# EAGLE board untitled (EAGLE 9.6.2)
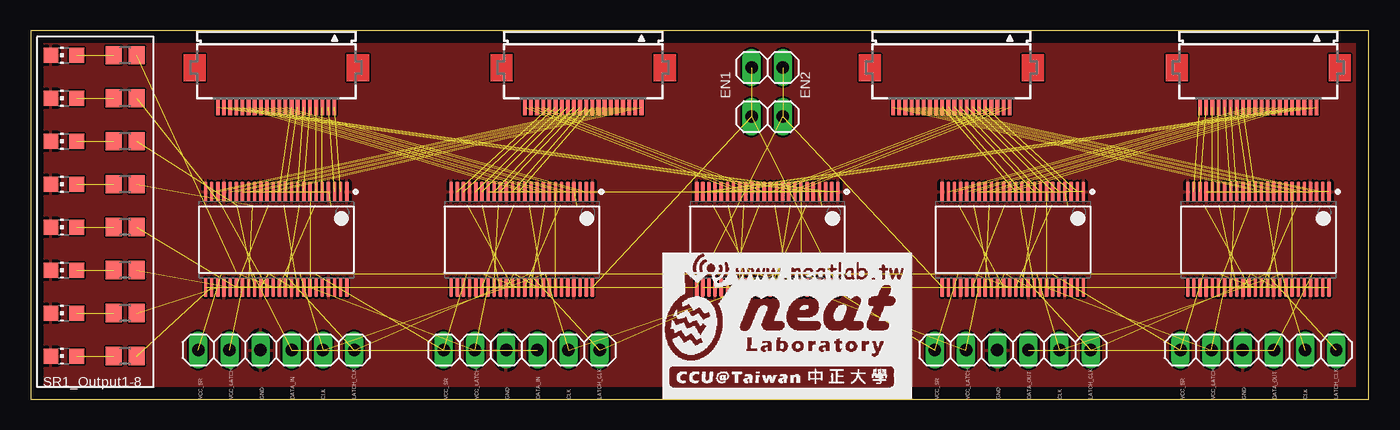
[diagram p0: board, top side]
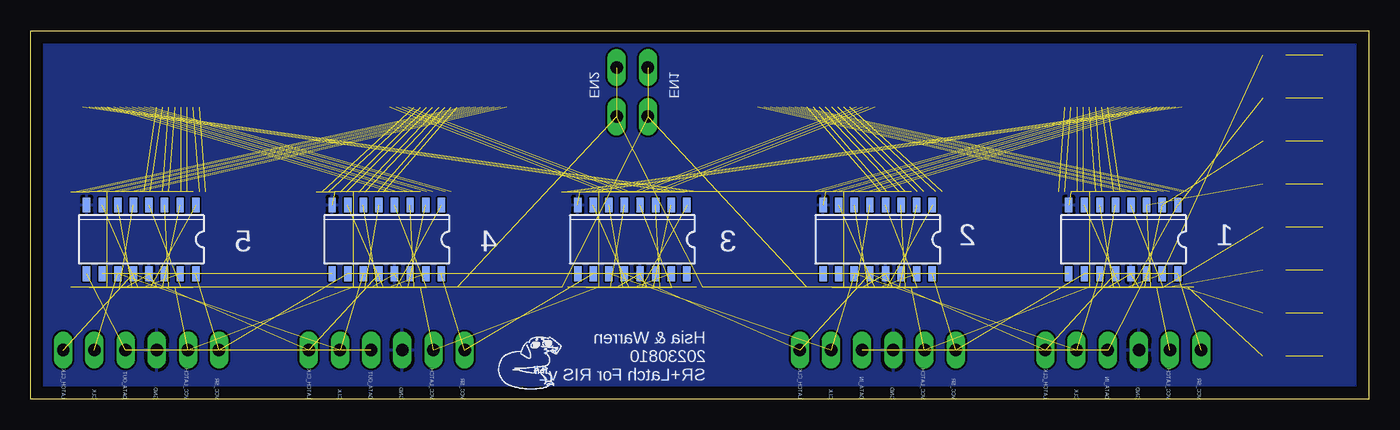
[diagram p1: board, bottom side, seen from below]

Size 109 x 30 mm. Coordinates in mm from the lower left corner, seen from the top.
Outline: 0,0 109,0 109,30 0,30 0,0
Copper layers (1+2*15+16): Top 0.035mm / dielectric 1.5mm / Route2 0.035mm / dielectric 0.15mm / Route15 0.035mm / dielectric 0.2mm / Bottom 0.035mm
Design rules "default *": minimum track width 6mil, minimum drill 0.35mm, track to track 6mil, track to pad 6mil, pad to pad 6mil, via to via 6mil, smd to smd 6mil, copper to edge 40mil, drill to drill 6mil, minimum pad ring 10mil, minimum via ring 8mil, stop-mask expansion 4mil, vias tented up to drill 0mil, thermal gap 10mil

## Footprints (pad centres in the part's own frame; a part is rotated, then mirrored left to right if it is on the bottom)
1X02 = drill 1.016 long: 1 -1.27,0; 2 1.27,0
1X06 = drill 1.016 long: 1 -6.35,0; 2 -3.81,0; 3 -1.27,0; 4 1.27,0; 5 3.81,0; 6 6.35,0
CHIP-LED0805 = smd 1.2 x 1.2: A 0,-1.05; C 0,1.05
R0805 = smd 1.3 x 1.5: 1 -0.95,0; 2 0.95,0
SO16 = smd 0.6 x 1.2: 1 -4.445,-2.8; 2 -3.175,-2.8; 3 -1.905,-2.8; 4 -0.635,-2.8; 5 0.635,-2.8; 6 1.905,-2.8; 7 3.175,-2.8; 8 4.445,-2.8; 9 4.445,2.8; 10 3.175,2.8; 11 1.905,2.8; 12 0.635,2.8; 13 -0.635,2.8; 14 -1.905,2.8; 15 -3.175,2.8; 16 -4.445,2.8
TEXAS_INSTRUMENTS_SN74LVC16373A_2 = smd 1.6 x 0.3: 1 -3.9,5.75; 2 -3.9,5.25; 3 -3.9,4.75; 4 -3.9,4.25; 5 -3.9,3.75; 6 -3.9,3.25; 7 -3.9,2.75; 8 -3.9,2.25; 9 -3.9,1.75; 10 -3.9,1.25; 11 -3.9,0.75; 12 -3.9,0.25; 13 -3.9,-0.25; 14 -3.9,-0.75; 15 -3.9,-1.25; 16 -3.9,-1.75; 17 -3.9,-2.25; 18 -3.9,-2.75; 19 -3.9,-3.25; 20 -3.9,-3.75; 21 -3.9,-4.25; 22 -3.9,-4.75; 23 -3.9,-5.25; 24 -3.9,-5.75; 25 3.9,-5.75; 26 3.9,-5.25; 27 3.9,-4.75; 28 3.9,-4.25; 29 3.9,-3.75; 30 3.9,-3.25; 31 3.9,-2.75; 32 3.9,-2.25; 33 3.9,-1.75; 34 3.9,-1.25; 35 3.9,-0.75; 36 3.9,-0.25; 37 3.9,0.25; 38 3.9,0.75; 39 3.9,1.25; 40 3.9,1.75; 41 3.9,2.25; 42 3.9,2.75; 43 3.9,3.25; 44 3.9,3.75; 45 3.9,4.25; 46 3.9,4.75; 47 3.9,5.25; 48 3.9,5.75
FH12-20S-0.5SH = smd 0.3 x 1.3: 1 -4.75,3.25; 2 -4.25,3.25; 3 -3.75,3.25; 4 -3.25,3.25; 5 -2.75,3.25; 6 -2.25,3.25; 7 -1.75,3.25; 8 -1.25,3.25; 9 -0.75,3.25; 10 -0.25,3.25; 11 0.25,3.25; 12 0.75,3.25; 13 1.25,3.25; 14 1.75,3.25; 15 2.25,3.25; 16 2.75,3.25; 17 3.25,3.25; 18 3.75,3.25; 19 4.25,3.25; 20 4.75,3.25

## Placement (x,y rotation side)
JP5  [1X02]  60,23 0 top
JP6  [1X02]  60,27 0 top
JP7  [1X06]  40,4 0 top
JP8  [1X06]  20,4 0 top
JP9  [1X06]  80,4 0 top
JP10  [1X06]  100,4 0 top
LED1  [CHIP-LED0805]  2.7,28 90 top
LED2  [CHIP-LED0805]  2.7,24.5 90 top
LED3  [CHIP-LED0805]  2.7,21 90 top
LED4  [CHIP-LED0805]  2.7,17.5 90 top
LED5  [CHIP-LED0805]  2.7,14 90 top
LED6  [CHIP-LED0805]  2.7,10.5 90 top
LED7  [CHIP-LED0805]  2.7,7 90 top
LED8  [CHIP-LED0805]  2.7,3.5 90 top
R1  [R0805]  7.7,28 180 top
R2  [R0805]  7.7,24.5 180 top
R3  [R0805]  7.7,21 180 top
R4  [R0805]  7.7,17.5 180 top
R5  [R0805]  7.7,14 180 top
R6  [R0805]  7.7,10.5 180 top
R7  [R0805]  7.7,7 180 top
R8  [R0805]  7.7,3.5 180 top
SR1  74HC595  [SO16]  20,13 180 bottom
SR2  74HC595  [SO16]  40,13 180 bottom
SR3  74HC595  [SO16]  60,13 180 bottom
SR4  74HC595  [SO16]  80,13 180 bottom
SR5  74HC595  [SO16]  100,13 180 bottom
U1  TEXAS_INSTRUMENTS_SN74LVC16373ATEXAS_INSTRUMENTS_SN74LVC16373A_0_2  [TEXAS_INSTRUMENTS_SN74LVC16373A_2]  20,13 270 top
U2  TEXAS_INSTRUMENTS_SN74LVC16373ATEXAS_INSTRUMENTS_SN74LVC16373A_0_2  [TEXAS_INSTRUMENTS_SN74LVC16373A_2]  40,13 270 top
U3  TEXAS_INSTRUMENTS_SN74LVC16373ATEXAS_INSTRUMENTS_SN74LVC16373A_0_2  [TEXAS_INSTRUMENTS_SN74LVC16373A_2]  60,13 270 top
U4  TEXAS_INSTRUMENTS_SN74LVC16373ATEXAS_INSTRUMENTS_SN74LVC16373A_0_2  [TEXAS_INSTRUMENTS_SN74LVC16373A_2]  80,13 270 top
U5  TEXAS_INSTRUMENTS_SN74LVC16373ATEXAS_INSTRUMENTS_SN74LVC16373A_0_2  [TEXAS_INSTRUMENTS_SN74LVC16373A_2]  100,13 270 top
U$1  [LOGO_SCALE_2.0]  51.5,0 0 top
X1  FH12-20S-0.5SH  [FH12-20S-0.5SH]  20,27 180 top
X2  FH12-20S-0.5SH  [FH12-20S-0.5SH]  75,27 180 top
X3  FH12-20S-0.5SH  [FH12-20S-0.5SH]  45,27 180 top
X4  FH12-20S-0.5SH  [FH12-20S-0.5SH]  100,27 180 top

## Library data of the parts
JP5-JP10 = pinhead
LED1-LED8 = led
R1-R8 = rcl; SPICEPREFIX: R
SR1-SR5 = 74HC595; AVAILABILITY: In Stock; DESCRIPTION: Shift Register Single 8-Bit Serial to Serial/Parallel 16-Pin SSOP T/R; MF: Nexperia; MP: 74HC595; PACKAGE: None; PRICE: None
U1-U5 = SN74LVC16373A(NEW_16BIT_LATCH); 3_STATE_OUTPUT: Yes; BITS: 16; CIIVA_IDS: 19307467; CODE__JEDEC: MO-153; DATASHEET_VERSION: SCAS755B; FOOTPRINT_VARIANT_NAME_0: Level C; FOOTPRINT_VARIANT_NAME_1: Level B; FOOTPRINT_VARIANT_NAME_2: Level A; F__NOM_VOLTAGEMAXMHZ: 100; ICC__NOM_VOLTAGEMAXMA: 0.02; IMPORTED: yes; IMPORTED_FROM: vault; IMPORT_TS: 1521844253; INPUT_TYPE: CMOS,TTL; LOGIC: true; MF: Texas Instruments; MPN: SN74LVC16373A; OPERATING_TEMPERATURE_RANGEC: -40 to 125,-40 to 85; OUTPUT_DRIVE_IOLIOHMAXMA: 24/-24; OUTPUT_LOGIC: Non-inverted; OUTPUT_TYPE: CMOS; PACKAGE: DGG0048A; PREFIX: U; RATING: Catalog; RELEASE_DATE: 1459328133; SCHMITT_TRIGGER: No; STATIC_CURRENT: 0.02; TECHNOLOGY_FAMILY: LVC; TPD__NOM_VOLTAGEMAXNS: 6.4,4.2,4.9; VAULT_GUID: 00FB3570-8383-4C82-A038-A58A20934C8C; VAULT_REVISION: B0EE8CD6-9ACA-4FFF-ACFC-C0240CF4C59E; VCC_MAX_V: 3.6; VCC_MIN_V: 1.65; VOLTAGE_NOM_V: 1.8,2.5,2.7,3.3
U$1 = all_in_one
X1-X4 = con-hirose; MPN: FH12-20S-0.5SH(55); OC_FARNELL: 1324549; OC_NEWARK: 34M6166

## Nets
CLK: JP7.5 JP8.5 JP9.5 JP10.5 SR1.11 SR2.11 SR3.11 SR4.11 SR5.11
DATA_IN: JP7.4 JP8.4 SR1.14
DATA_OUT: JP9.4 JP10.4 SR5.9
EN1: JP5.1 JP6.1 U1.48 U2.48 U3.48 U4.48 U5.48
EN2: JP5.2 JP6.2 U1.25 U2.25 U3.25 U4.25 U5.25
GND: JP7.3 JP8.3 JP9.3 JP10.3 LED1.C LED2.C LED3.C LED4.C LED5.C LED6.C LED7.C LED8.C SR1.8 SR1.13 SR2.8 SR2.13 SR3.8 SR3.13 SR4.8 SR4.13 SR5.8 SR5.13 U1.1 U1.4 U1.10 U1.15 U1.21 U1.24 U1.28 U1.34 U1.39 U1.45 U2.1 U2.4 U2.10 U2.15 U2.21 U2.24 U2.28 U2.34 U2.39 U2.45 U3.1 U3.4 U3.10 U3.15 U3.21 U3.24 U3.28 U3.34 U3.39 U3.45 U4.1 U4.4 U4.10 U4.15 U4.21 U4.24 U4.28 U4.34 U4.39 U4.45 U5.1 U5.4 U5.10 U5.15 U5.21 U5.24 U5.28 U5.34 U5.39 U5.45
LATCH_CLK: JP7.6 JP8.6 JP9.6 JP10.6 SR1.12 SR2.12 SR3.12 SR4.12 SR5.12
LED1_1: U1.2 X1.1
LED1_2: U1.3 X1.2
LED1_3: U1.5 X1.3
LED1_4: U1.6 X1.4
LED1_5: U1.8 X1.5
LED1_6: U1.9 X1.6
LED1_7: U1.11 X1.7
LED1_8: U1.12 X1.8
LED1_9: U2.2 X1.9
LED1_10: U2.3 X1.10
LED1_11: U2.5 X1.11
LED1_12: U2.6 X1.12
LED1_13: U2.8 X1.13
LED1_14: U2.9 X1.14
LED1_15: U2.11 X1.15
LED1_16: U2.12 X1.16
LED1_17: U3.2 X1.17
LED1_18: U3.3 X1.18
LED1_19: U3.5 X1.19
LED1_20: U3.6 X1.20
LED1_21: U3.8 X2.1
LED1_22: U3.9 X2.2
LED1_23: U3.11 X2.3
LED1_24: U3.12 X2.4
LED1_25: U4.2 X2.5
LED1_26: U4.3 X2.6
LED1_27: U4.5 X2.7
LED1_28: U4.6 X2.8
LED1_29: U4.8 X2.9
LED1_30: U4.9 X2.10
LED1_31: U4.11 X2.11
LED1_32: U4.12 X2.12
LED1_33: U5.2 X2.13
LED1_34: U5.3 X2.14
LED1_35: U5.5 X2.15
LED1_36: U5.6 X2.16
LED1_37: U5.8 X2.17
LED1_38: U5.9 X2.18
LED1_39: U5.11 X2.19
LED1_40: U5.12 X2.20
LED2_1: U1.13 X3.1
LED2_2: U1.14 X3.2
LED2_3: U1.16 X3.3
LED2_4: U1.17 X3.4
LED2_5: U1.19 X3.5
LED2_6: U1.20 X3.6
LED2_7: U1.22 X3.7
LED2_8: U1.23 X3.8
LED2_9: U2.13 X3.9
LED2_10: U2.14 X3.10
LED2_11: U2.16 X3.11
LED2_12: U2.17 X3.12
LED2_13: U2.19 X3.13
LED2_14: U2.20 X3.14
LED2_15: U2.22 X3.15
LED2_16: U2.23 X3.16
LED2_17: U3.13 X3.17
LED2_18: U3.14 X3.18
LED2_19: U3.16 X3.19
LED2_20: U3.17 X3.20
LED2_21: U3.19 X4.1
LED2_22: U3.20 X4.2
LED2_23: U3.22 X4.3
LED2_24: U3.23 X4.4
LED2_25: U4.13 X4.5
LED2_26: U4.14 X4.6
LED2_27: U4.16 X4.7
LED2_28: U4.17 X4.8
LED2_29: U4.19 X4.9
LED2_30: U4.20 X4.10
LED2_31: U4.22 X4.11
LED2_32: U4.23 X4.12
LED2_33: U5.13 X4.13
LED2_34: U5.14 X4.14
LED2_35: U5.16 X4.15
LED2_36: U5.17 X4.16
LED2_37: U5.19 X4.17
LED2_38: U5.20 X4.18
LED2_39: U5.22 X4.19
LED2_40: U5.23 X4.20
N$1: SR1.9 SR2.14
N$2: SR4.9 SR5.14
N$3: LED1.A R1.2
N$4: LED2.A R2.2
N$5: LED3.A R3.2
N$6: LED4.A R4.2
N$7: LED5.A R5.2
N$8: SR2.9 SR3.14
N$9: LED6.A R6.2
N$10: LED7.A R7.2
N$11: LED8.A R8.2
N$15: SR3.9 SR4.14
SR_OUT1_1: R1.1 SR1.15 U1.36 U1.47
SR_OUT1_2: R2.1 SR1.1 U1.35 U1.46
SR_OUT1_3: R3.1 SR1.2 U1.33 U1.44
SR_OUT1_4: R4.1 SR1.3 U1.32 U1.43
SR_OUT1_5: R5.1 SR1.4 U1.30 U1.41
SR_OUT1_6: R6.1 SR1.5 U1.29 U1.40
SR_OUT1_7: R7.1 SR1.6 U1.27 U1.38
SR_OUT1_8: R8.1 SR1.7 U1.26 U1.37
SR_OUT2_1: SR2.15 U2.36 U2.47
SR_OUT2_2: SR2.1 U2.35 U2.46
SR_OUT2_3: SR2.2 U2.33 U2.44
SR_OUT2_4: SR2.3 U2.32 U2.43
SR_OUT2_5: SR2.4 U2.30 U2.41
SR_OUT2_6: SR2.5 U2.29 U2.40
SR_OUT2_7: SR2.6 U2.27 U2.38
SR_OUT2_8: SR2.7 U2.26 U2.37
SR_OUT3_1: SR3.15 U3.36 U3.47
SR_OUT3_2: SR3.1 U3.35 U3.46
SR_OUT3_3: SR3.2 U3.33 U3.44
SR_OUT3_4: SR3.3 U3.32 U3.43
SR_OUT3_5: SR3.4 U3.30 U3.41
SR_OUT3_6: SR3.5 U3.29 U3.40
SR_OUT3_7: SR3.6 U3.27 U3.38
SR_OUT3_8: SR3.7 U3.26 U3.37
SR_OUT4_1: SR4.15 U4.36 U4.47
SR_OUT4_2: SR4.1 U4.35 U4.46
SR_OUT4_3: SR4.2 U4.33 U4.44
SR_OUT4_4: SR4.3 U4.32 U4.43
SR_OUT4_5: SR4.4 U4.30 U4.41
SR_OUT4_6: SR4.5 U4.29 U4.40
SR_OUT4_7: SR4.6 U4.27 U4.38
SR_OUT4_8: SR4.7 U4.26 U4.37
SR_OUT5_1: SR5.15 U5.36 U5.47
SR_OUT5_2: SR5.1 U5.35 U5.46
SR_OUT5_3: SR5.2 U5.33 U5.44
SR_OUT5_4: SR5.3 U5.32 U5.43
SR_OUT5_5: SR5.4 U5.30 U5.41
SR_OUT5_6: SR5.5 U5.29 U5.40
SR_OUT5_7: SR5.6 U5.27 U5.38
SR_OUT5_8: SR5.7 U5.26 U5.37
VCC_LATCH: JP7.2 JP8.2 JP9.2 JP10.2 U1.7 U1.18 U1.31 U1.42 U2.7 U2.18 U2.31 U2.42 U3.7 U3.18 U3.31 U3.42 U4.7 U4.18 U4.31 U4.42 U5.7 U5.18 U5.31 U5.42
VCC_SR: JP7.1 JP8.1 JP9.1 JP10.1 SR1.10 SR1.16 SR2.10 SR2.16 SR3.10 SR3.16 SR4.10 SR4.16 SR5.10 SR5.16

## Tracks (layer width: path | path; a pad name or v marks a point on that pad's centre or on a via)
CLK  (8 unrouted)
DATA_IN  (2 unrouted)
DATA_OUT  (2 unrouted)
EN1  (6 unrouted)
EN2  (6 unrouted)
GND  (39 unrouted)
  pour Top: -1,31 -1,-1 110,-1 110,31 109,32 1,32 0,31
  pour Bottom: -1,35 -1,-3 112,-3 112,32 110,34 109,35
LATCH_CLK  (8 unrouted)
LED1_1  (1 unrouted)
LED1_2  (1 unrouted)
LED1_3  (1 unrouted)
LED1_4  (1 unrouted)
LED1_5  (1 unrouted)
LED1_6  (1 unrouted)
LED1_7  (1 unrouted)
LED1_8  (1 unrouted)
LED1_9  (1 unrouted)
LED1_10  (1 unrouted)
LED1_11  (1 unrouted)
LED1_12  (1 unrouted)
LED1_13  (1 unrouted)
LED1_14  (1 unrouted)
LED1_15  (1 unrouted)
LED1_16  (1 unrouted)
LED1_17  (1 unrouted)
LED1_18  (1 unrouted)
LED1_19  (1 unrouted)
LED1_20  (1 unrouted)
LED1_21  (1 unrouted)
LED1_22  (1 unrouted)
LED1_23  (1 unrouted)
LED1_24  (1 unrouted)
LED1_25  (1 unrouted)
LED1_26  (1 unrouted)
LED1_27  (1 unrouted)
LED1_28  (1 unrouted)
LED1_29  (1 unrouted)
LED1_30  (1 unrouted)
LED1_31  (1 unrouted)
LED1_32  (1 unrouted)
LED1_33  (1 unrouted)
LED1_34  (1 unrouted)
LED1_35  (1 unrouted)
LED1_36  (1 unrouted)
LED1_37  (1 unrouted)
LED1_38  (1 unrouted)
LED1_39  (1 unrouted)
LED1_40  (1 unrouted)
LED2_1  (1 unrouted)
LED2_2  (1 unrouted)
LED2_3  (1 unrouted)
LED2_4  (1 unrouted)
LED2_5  (1 unrouted)
LED2_6  (1 unrouted)
LED2_7  (1 unrouted)
LED2_8  (1 unrouted)
LED2_9  (1 unrouted)
LED2_10  (1 unrouted)
LED2_11  (1 unrouted)
LED2_12  (1 unrouted)
LED2_13  (1 unrouted)
LED2_14  (1 unrouted)
LED2_15  (1 unrouted)
LED2_16  (1 unrouted)
LED2_17  (1 unrouted)
LED2_18  (1 unrouted)
LED2_19  (1 unrouted)
LED2_20  (1 unrouted)
LED2_21  (1 unrouted)
LED2_22  (1 unrouted)
LED2_23  (1 unrouted)
LED2_24  (1 unrouted)
LED2_25  (1 unrouted)
LED2_26  (1 unrouted)
LED2_27  (1 unrouted)
LED2_28  (1 unrouted)
LED2_29  (1 unrouted)
LED2_30  (1 unrouted)
LED2_31  (1 unrouted)
LED2_32  (1 unrouted)
LED2_33  (1 unrouted)
LED2_34  (1 unrouted)
LED2_35  (1 unrouted)
LED2_36  (1 unrouted)
LED2_37  (1 unrouted)
LED2_38  (1 unrouted)
LED2_39  (1 unrouted)
LED2_40  (1 unrouted)
N$1  (1 unrouted)
N$2  (1 unrouted)
N$3  (1 unrouted)
N$4  (1 unrouted)
N$5  (1 unrouted)
N$6  (1 unrouted)
N$7  (1 unrouted)
N$8  (1 unrouted)
N$9  (1 unrouted)
N$10  (1 unrouted)
N$11  (1 unrouted)
N$15  (1 unrouted)
SR_OUT1_1  (3 unrouted)
SR_OUT1_2  (3 unrouted)
SR_OUT1_3  (3 unrouted)
SR_OUT1_4  (3 unrouted)
SR_OUT1_5  (3 unrouted)
SR_OUT1_6  (3 unrouted)
SR_OUT1_7  (3 unrouted)
SR_OUT1_8  (3 unrouted)
SR_OUT2_1  (2 unrouted)
SR_OUT2_2  (2 unrouted)
SR_OUT2_3  (2 unrouted)
SR_OUT2_4  (2 unrouted)
SR_OUT2_5  (2 unrouted)
SR_OUT2_6  (2 unrouted)
SR_OUT2_7  (2 unrouted)
SR_OUT2_8  (2 unrouted)
SR_OUT3_1  (2 unrouted)
SR_OUT3_2  (2 unrouted)
SR_OUT3_3  (2 unrouted)
SR_OUT3_4  (2 unrouted)
SR_OUT3_5  (2 unrouted)
SR_OUT3_6  (2 unrouted)
SR_OUT3_7  (2 unrouted)
SR_OUT3_8  (2 unrouted)
SR_OUT4_1  (2 unrouted)
SR_OUT4_2  (2 unrouted)
SR_OUT4_3  (2 unrouted)
SR_OUT4_4  (2 unrouted)
SR_OUT4_5  (2 unrouted)
SR_OUT4_6  (2 unrouted)
SR_OUT4_7  (2 unrouted)
SR_OUT4_8  (2 unrouted)
SR_OUT5_1  (2 unrouted)
SR_OUT5_2  (2 unrouted)
SR_OUT5_3  (2 unrouted)
SR_OUT5_4  (2 unrouted)
SR_OUT5_5  (2 unrouted)
SR_OUT5_6  (2 unrouted)
SR_OUT5_7  (2 unrouted)
SR_OUT5_8  (2 unrouted)
VCC_LATCH  (23 unrouted)
VCC_SR  (13 unrouted)

## Text on the board
tNames: EN1 | EN2 | SR1_Output1-8 | VCC_SR | VCC_LATCH | GND | DATA_IN | CLK | LATCH_CLK | VCC_SR | VCC_LATCH | GND | DATA_IN | CLK | LATCH_CLK | VCC_SR | VCC_LATCH | GND | DATA_OUT | CLK | LATCH_CLK | VCC_SR | VCC_LATCH | GND | DATA_OUT | CLK | LATCH_CLK
bNames: EN1 | EN2 | 1 | 2 | 3 | 4 | 5 | Hsia & Warren / 20230810 / SR+Latch For RIS v2 | VCC_SR | VCC_LATCH | GND | DATA_IN | CLK | LATCH_CLK | VCC_SR | VCC_LATCH | GND | DATA_IN | CLK | LATCH_CLK | VCC_SR | VCC_LATCH | GND | DATA_OUT | CLK | LATCH_CLK | VCC_SR | VCC_LATCH | GND | DATA_OUT | CLK | LATCH_CLK